# Altium PCB Nucleo_Dory_QFN68.PcbDoc (part 3 of 3)
Units mm, origin at the board's own origin, x right, y up, seen from the top; angles counter-clockwise.
Board outline 70.13 x 64.58 mm, 4 copper layers (L1, L2, L3, L4), stack 1.565 mm thick; 212 components, 161 nets, 1280 pads, 261 vias.
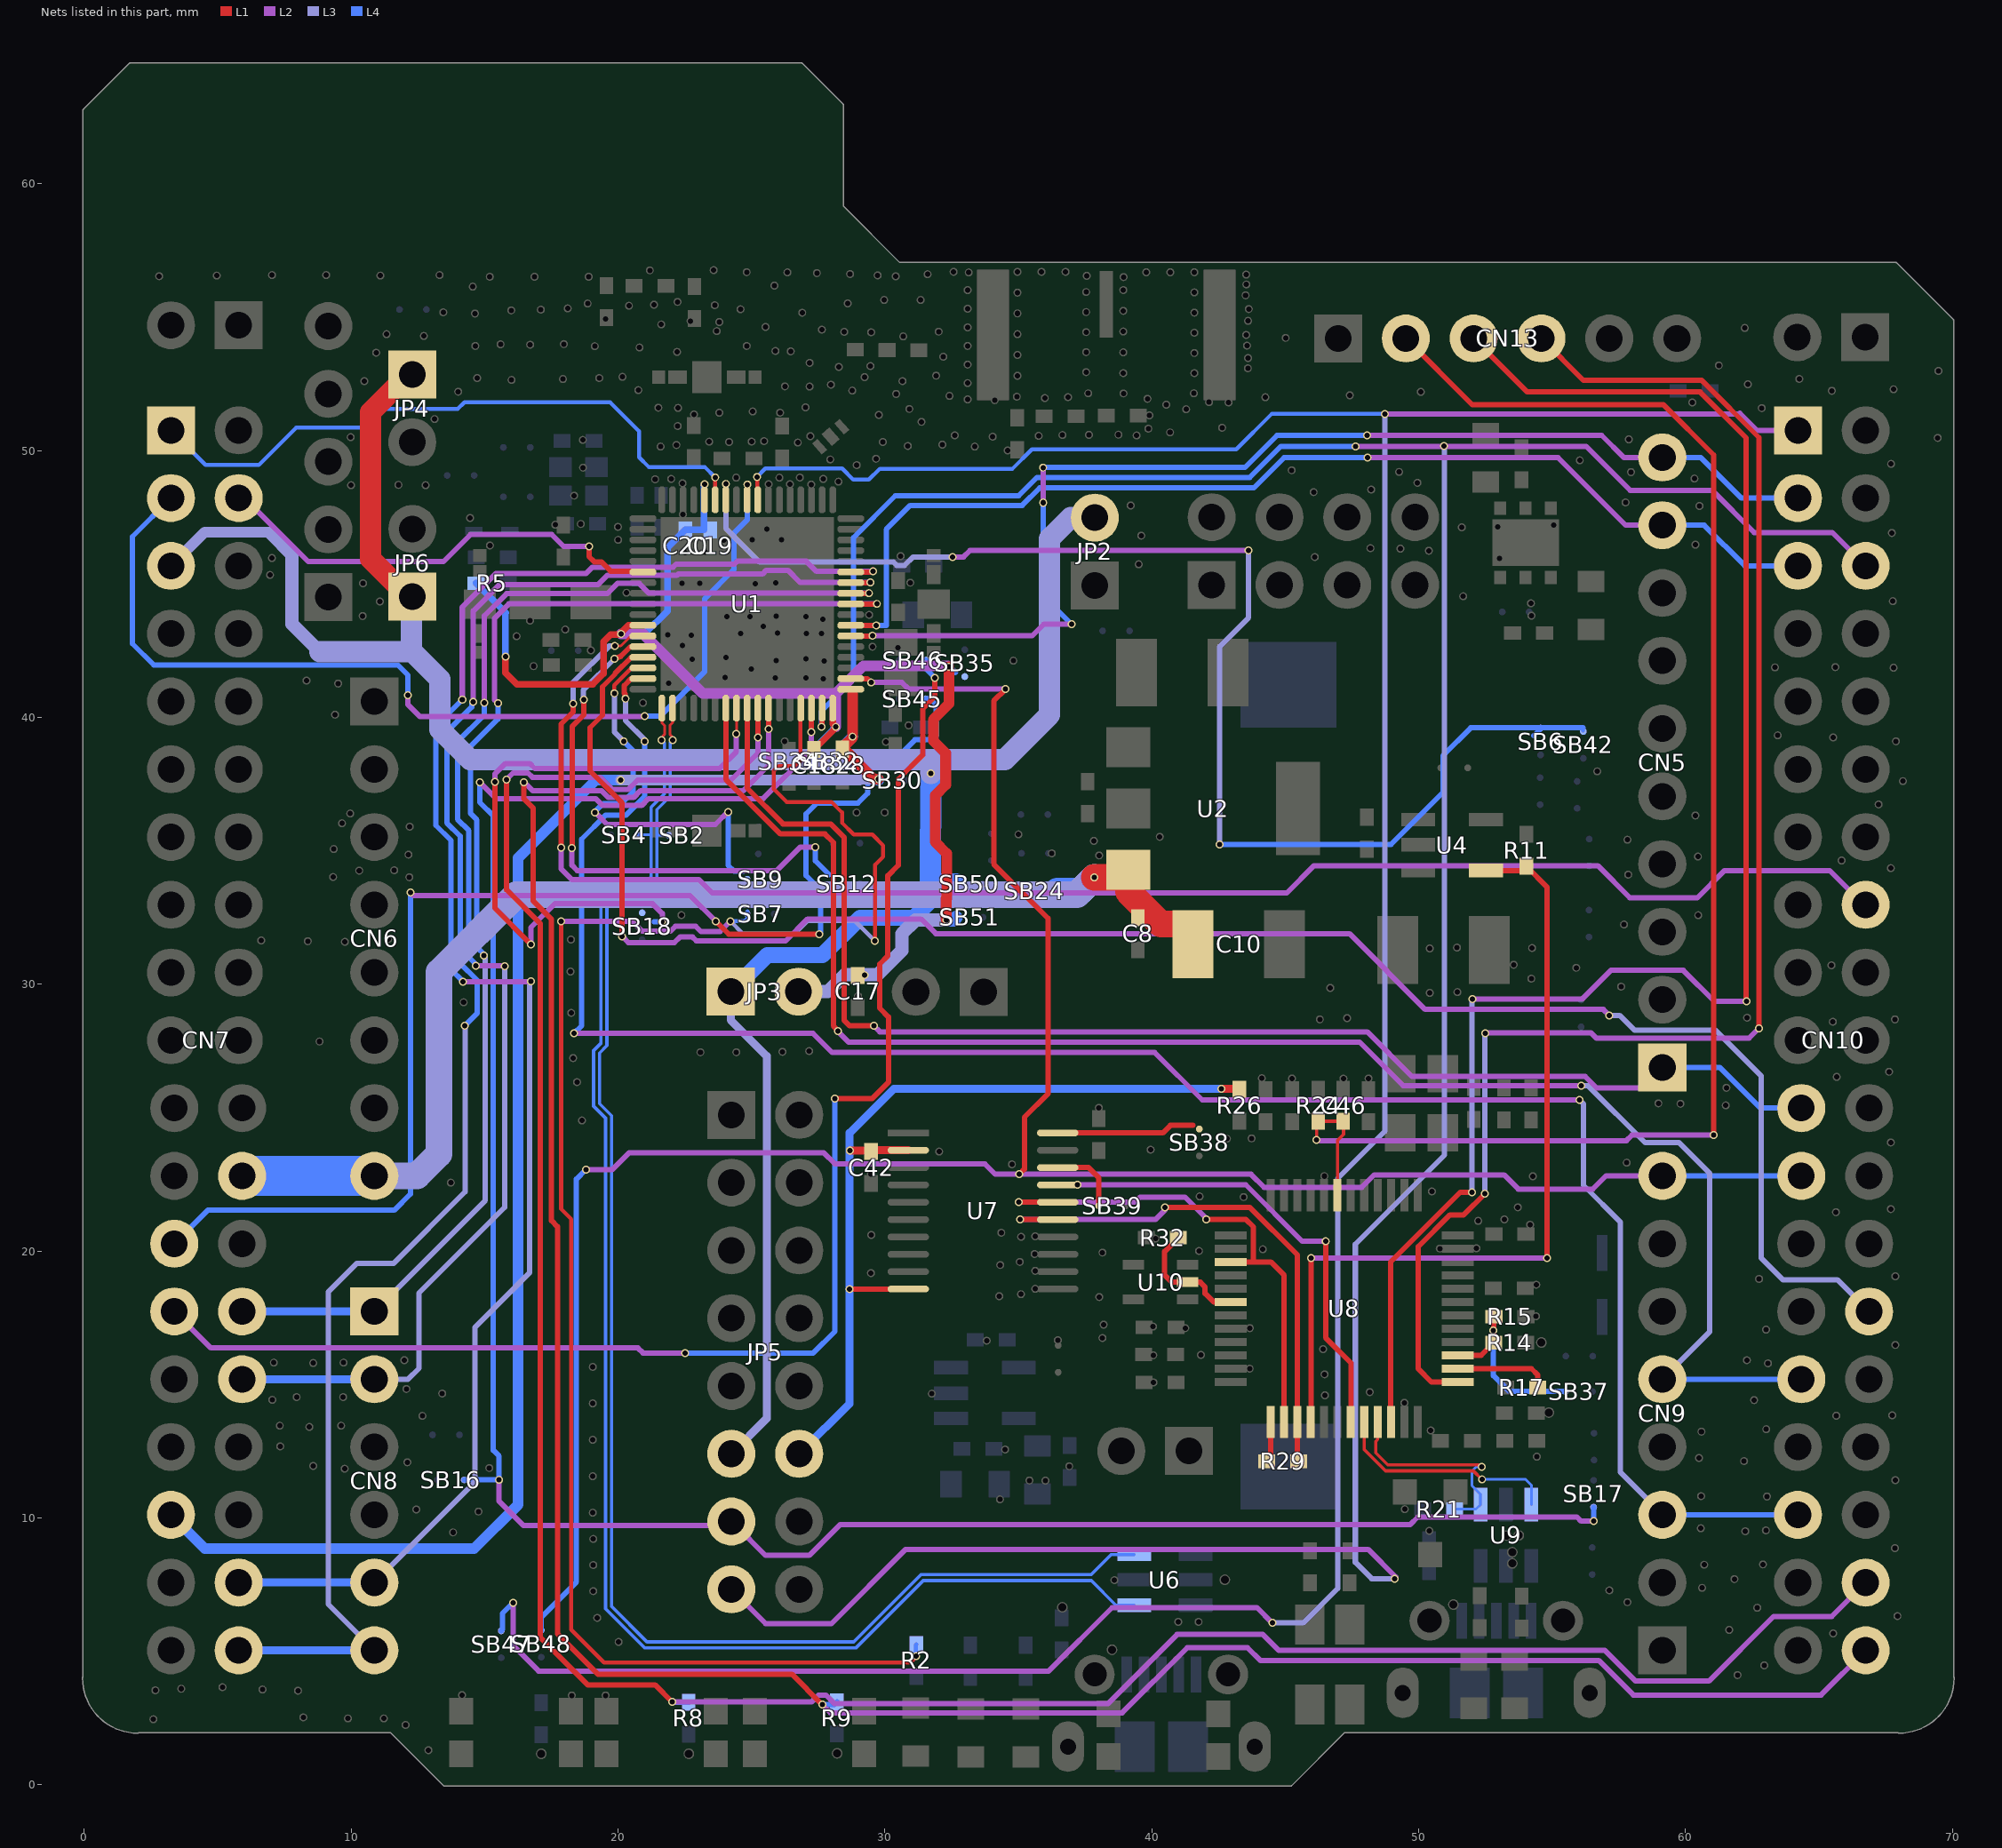
[diagram p5: the nets of this part, all layers, seen from the top]

## Via types
v1: diameter 0.3, hole 0.2, L1 to L4, tented both sides, 254 vias
v2: diameter 0.406, hole 0.203, L1 to L4, tented both sides, 7 vias

## Nets (pads, with @x,y where several pads share a name; then routed paths per layer and width w, separated by ;. In a path a pad name is that pad's centre, name@x,y a point inside that pad or via, vN(x,y) a via of type N, cw(c..) or ccw(c..) an arc to the next point about the centre after c; other vN are vias at no path point) (continued)
PB5: R2.1 SB7.1 U1.65 | length 67.3
  L1 w0.15: v1(17.87,32.352) 17.87,21.583 18.248,21.205 18.248,5.814 19.478,4.584 30.962,4.584 31.168,4.79 v1(31.168,4.829) ; U1.65@26.844,40.349 26.838,40.343 26.838,38.372 26.736,38.269 26.725,38.269 26.625,38.17 26.016,38.17 25.836,37.99 25.836,37.318 26.318,36.836 27.996,36.836 28.392,36.44 28.392,36.053 28.836,35.609 29.529,35.609 29.938,35.2 29.938,34.783 29.63,34.475 v1(29.63,31.634)
  L2 w0.2: v1(17.87,32.352) 20.536,32.352 20.903,31.985 21.963,31.985 22.155,32.177 22.906,32.177 23.108,31.975 23.825,31.975 v1(24.214,32.364)
  L3 w0.15: v1(24.214,32.364) 24.675,31.903 26.636,31.903 27.098,32.365 28.886,32.365 29.63,31.62 v1(29.63,31.634)
  L4 w0.15: v1(17.87,32.352) v1@17.872,32.354 ; v1@24.214,32.384 v1(24.214,32.364) 24.737,32.364 24.847,32.474 SB7.1@24.847,32.739 ; v1(31.168,4.829) 31.168,5.256 R2.1@31.175,5.263
PB6: JP5.13 pad.94 SB16.2 SB17.1 U1.66 | length 86.8
  L1 w0.2: v1(27.244,39.445) U1.66@27.244,40.349
  L2 w0.2: v1(14.816,37.576) 15.436,36.956 19.165,36.956 19.424,36.697 20.885,36.697 21.144,36.956 25.439,36.956 27.244,38.761 v1(27.244,39.445) v1@27.23,39.459 ; pad.94@15.546,11.427 15.546,10.632 16.452,9.726 24.399,9.726 25.529,8.596 27.166,8.596 28.327,9.757 49.69,9.757 49.967,10.034 55.933,10.034 56.089,9.878 v1(56.556,9.878)
  L4 w0.2: SB16.2@14.239,11.429 pad.94@15.544,11.429 15.544,12.321 15.327,12.538 15.327,36.309 14.816,36.82 v1(14.816,37.576) ; v1(56.556,9.878) SB17.1@56.556,10.405
PB7: CN10.6 JP5.15 U1.67 | length 121.5
  L1 w0.2: v1(27.621,39.652) 27.644,39.675 U1.67@27.644,40.349
  L2 w0.2: JP5.15@24.247,7.327 25.535,6.039 27.995,6.039 30.779,8.823 48.109,8.823 49.149,7.783 v1(49.095,7.729) ; v1(47.635,50.159) 56.275,50.159 57.923,48.511 60.99,48.511 62.569,46.932 65.498,46.932 CN10.6@66.75,45.68
  L3 w0.2: v1(49.095,7.729) 48.238,7.729 47.627,8.34 47.627,20.257 50.965,23.595 50.965,50.166 v1(50.955,50.176)
  L4 w0.2: v1(27.621,39.652) 27.621,40.234 28.826,41.439 28.826,46.743 30.389,48.306 35.009,48.306 35.692,48.989 43.667,48.989 44.837,50.159 v1(47.635,50.159)
PB8: CN5.10 CN10.3 pad.100 pad.127 U1.6 | length 44.5
  L1 w0.2: U1.6@28.722,43.052 29.523,43.052 pad.100@29.534,43.063
  L2 w0.2: pad.100@29.534,43.063 35.523,43.063 35.956,43.496 v1(36.992,43.496) ; pad.127@35.925,49.364 35.925,48.095 35.93,48.09 v1(35.93,48.049) ; v1(48.062,50.564) 56.851,50.564 56.857,50.57 57.683,49.744 CN5.10@59.13,49.744
  L4 w0.2: pad.127@35.925,49.368 43.491,49.368 44.693,50.57 44.699,50.564 v1(48.062,50.564) ; v1(35.93,48.049) 35.93,44.558 v1(36.992,43.496) ; CN5.10@59.13,49.744 60.565,49.744 62.089,48.22 CN10.3@64.21,48.22
PB9: CN5.9 CN10.5 pad.101 U1.7 | length 41.7
  L1 w0.2: U1.7@28.722,43.452 29.51,43.452
  L2 w0.2: v1(48.077,49.74) 55.222,49.74 57.758,47.204 CN5.9@59.13,47.204
  L4 w0.2: pad.101@29.678,43.448 30.048,43.448 30.048,47.047 30.949,47.948 35.146,47.948 35.803,48.605 43.825,48.605 44.96,49.74 v1(48.077,49.74) ; CN5.9@59.13,47.204 60.696,47.204 62.22,45.68 CN10.5@64.21,45.68
PB10: pad.72 SB6.2 SB42.1 U1.28 | length 50.3
  L2 w0.2: v1(32.543,46.016) 32.948,46.016 33.184,46.252 v1(43.628,46.252)
  L3 w0.2: pad.72@24.042,48.749 24.042,47.086 25.308,45.82 30.323,45.82 30.447,45.696 30.737,45.696 31.057,46.016 v1(32.543,46.016) ; v1(42.546,35.247) 42.546,42.659 43.628,43.741 v1(43.628,46.252)
  L4 w0.127: SB6.2@54.57,39.602 SB6.2@54.58,39.612 ; SB42.1@56.155,39.496 56.155,39.612
  L4 w0.2: v1(42.546,35.247) 48.968,35.247 50.907,37.186 50.907,38.567 51.95,39.61 54.606,39.61 54.314,39.318 ; SB6.2@54.58,39.612 56.155,39.612
PB11: CN7.1 pad.71 U1.29 | length 24.5
  L1 w0.15: U1.29@23.64,48.159 pad.71@23.64,48.996
  L4 w0.15: CN7.1@3.25,50.76 4.544,49.466 6.548,49.466 7.938,50.856 10.412,50.856 11.117,51.561 13.993,51.561 14.244,51.812 19.702,51.812 20.791,50.723 20.791,49.746 21.15,49.387 23.249,49.387 pad.71@23.64,48.996
PB12: CN10.16 pad.86 U1.46 | length 61.6
  L1 w0.1: pad.86@19.88,42.678 20.106,42.678 20.48,43.052 U1.46@20.941,43.052
  L1 w0.2: v1(17.87,35.119) 17.87,39.757 18.32,40.207 v1(18.32,40.516)
  L2 w0.2: v1@17.877,35.102 17.877,34.316 18.262,33.931 23.025,33.931 23.536,33.42 45.055,33.42 46.077,34.442 56.713,34.442 57.912,33.243 60.441,33.243 61.459,34.261 65.398,34.261 66.679,32.98 CN10.16@66.75,32.98
  L3 w0.2: v1(18.32,40.516) 18.32,41.323 19.675,42.678 pad.86@19.88,42.678
PB13: pad.87 SB12.1 U1.47 | length 21.2
  L1 w0.1: 20.076,42.29 20.032,42.315 20.468,42.682 U1.47@20.468,42.652
  L1 w0.2: v1(18.272,35.109) 18.282,35.119 18.282,39.66 18.721,40.099 v1(18.721,40.659) ; pad.87@19.866,42.196 20.097,42.281 20.468,42.652 U1.47@20.941,42.652
  L2 w0.2: v1(18.272,35.109) 18.272,34.461 18.469,34.264 25.952,34.264 26.821,35.133 v1(27.391,35.133)
  L3 w0.2: v1@18.71,40.542 v1@18.71,40.648 ; v1(18.721,40.659) v1@18.71,40.648 ; pad.87@19.866,42.196 18.71,41.04 v1@18.71,40.648
  L4 w0.2: v1(27.391,35.133) 27.391,34.629 27.912,34.108
PB14: CN10.28 U1.48 | length 69.4
  L1 w0.15: U1.48@20.483,42.252 U1.48@20.941,42.252
  L1 w0.17: 19.418,41.15 19.897,41.629 19.897,41.657
  L1 w0.2: 19.418,41.15 19.418,40.085 18.952,39.619 18.952,37.999 20.154,36.797 v1(20.154,31.796) ; 19.897,41.657 U1.48@20.483,42.242
  L2 w0.2: v1(20.154,31.796) 20.389,31.561 22.112,31.561 22.324,31.773 22.791,31.773 22.938,31.626 26.28,31.626 27.102,32.448 31.358,32.448 31.909,31.897 47.409,31.897 50.247,29.059 56.92,29.059 v1(57.148,28.831)
  L3 w0.2: v1(57.148,28.831) 57.155,28.838 57.53,28.838 58.084,28.284 61.113,28.284 62.827,26.57 62.827,19.746 63.644,18.929 65.688,18.929 CN10.28@66.877,17.74
PB15: pad.89 pad.135 SB9.1 U1.49 | length 15.5
  L1 w0.15: pad.89@19.863,40.906 19.863,41.208 20.507,41.852 U1.49@20.941,41.852
  L2 w0.2: v1@19.141,36.437 v1(19.138,36.44) 19.59,35.988 23.648,35.988 24.151,36.491 24.151,36.484 v1(24.126,36.459)
  L3 w0.2: pad.89@19.863,40.906 19.863,39.453 pad.135@20.21,39.106
  L4 w0.2: v1(19.138,36.44) 19.132,36.446 19.132,36.458 19.447,36.773 20.132,36.773 20.569,37.21 20.569,38.747 pad.135@20.21,39.106 ; v1(24.126,36.459) 24.126,34.456 24.349,34.233 24.72,34.233
PC0: CN7.28 CN8.1 pad.103 U1.9 | length 49
  L1 w0.2: U1.9@28.722,44.252 29.696,44.252 pad.103@29.698,44.254
  L2 w0.2: v1(15.499,40.529) 15.375,40.653 15.375,43.715 15.914,44.254 pad.103@29.698,44.254
  L3 w0.2: CN8.1@10.87,17.74 15.029,21.899 15.029,31.072 15.019,31.082 v1(14.976,31.082)
  L4 w0.2: v1(14.976,31.082) 15.023,31.082 14.714,31.391 14.714,36.161 14.466,36.409 14.466,38.905 15.499,39.938 v1(15.499,40.529)
  L4 w0.3: CN7.28@5.917,17.74 CN8.1@10.87,17.74
PC1: CN7.30 CN8.2 pad.104 U1.10 | length 53.8
  L1 w0.2: U1.10@28.722,44.652 29.398,44.652 pad.104@29.402,44.656
  L2 w0.2: v1(14.679,30.69) 15.738,30.69 v1(15.751,30.677) ; v1(14.991,40.543) 14.991,43.807 15.825,44.641 19.601,44.641 19.98,45.02 20.793,45.02 21.157,44.656 pad.104@29.402,44.656
  L3 w0.2: CN8.2@10.87,15.2 12.134,15.2 12.542,15.608 12.542,18.429 15.751,21.638 v1(15.751,30.677)
  L4 w0.2: v1(14.679,30.69) 14.679,30.744 14.414,31.009 14.414,35.758 13.988,36.184 13.988,39.087 14.991,40.09 v1(14.991,40.543)
  L4 w0.3: CN7.30@5.917,15.2 CN8.2@10.87,15.2
PC2: CN7.38 CN8.6 U1.11 | length 65.3
  L1 w0.2: U1.11@28.722,45.052 29.459,45.052 v1(29.463,45.056)
  L2 w0.2: v1(14.579,40.584) 14.579,43.992 15.571,44.983 19.257,44.983 19.594,45.32 22.206,45.32 22.261,45.375 25.415,45.375 25.555,45.516 26.368,45.516 26.828,45.056 v1(29.463,45.056) v1@29.491,45.028
  L3 w0.2: CN8.6@10.87,5.04 9.139,6.771 9.139,18.467 10.209,19.537 11.589,19.537 14.275,22.223 v1@14.275,28.454
  L4 w0.2: v1(14.263,28.454) 14.73,28.921 14.73,30.144 14.084,30.79 14.084,35.557 13.589,36.052 13.589,39.458 14.516,40.385 14.516,40.549 14.579,40.612 v1(14.579,40.584)
  L4 w0.3: CN7.38@5.79,5.04 CN8.6@10.87,5.04
PC3: CN7.36 CN8.5 U1.12 | length 64.6
  L1 w0.2: U1.12@28.722,45.452 29.481,45.452 29.551,45.522 v1(29.551,45.47)
  L2 w0.2: v1(14.166,40.667) 14.166,44.134 15.421,45.389 18.799,45.389 19.042,45.632 22.065,45.632 22.177,45.744 24.362,45.744 24.471,45.854 27.052,45.854 27.436,45.47 v1(29.551,45.47) ; v1(14.194,30.103) 16.722,30.103 v1(16.733,30.114)
  L3 w0.2: CN8.5@10.87,7.58 14.637,11.347 14.637,17.14 16.681,19.184 16.681,30.062 v1(16.733,30.114)
  L4 w0.2: v1(14.166,40.667) 13.177,39.678 13.177,35.955 13.741,35.391 13.741,30.556 v1(14.194,30.103)
  L4 w0.3: CN7.36@5.79,7.58 CN8.5@10.87,7.58
PC4: CN10.1 pad.75 SB47.2 U1.25 | length 122.1
  L1 w0.15: U1.25@25.21,48.189 25.21,48.557 25.226,48.557 25.226,48.996 pad.75@25.21,49.012
  L2 w0.2: v1(16.075,6.829) 16.075,5.213 17.025,4.263 36.136,4.263 38.511,6.638 43.944,6.638 v1(44.516,6.066) ; v1(48.729,51.363) 61.982,51.363 61.989,51.37 61.995,51.364 62.029,51.398 62.667,50.76 CN10.1@64.21,50.76
  L3 w0.2: v1(44.516,6.066) 45.679,6.066 46.971,7.358 46.971,22.728 48.727,24.484 48.727,51.361 v1(48.729,51.363)
  L4 w0.15: pad.75@25.21,49.012 25.524,49.326 28.395,49.326 28.81,48.911 29.403,48.911 29.813,49.321 34.781,49.321 35.509,50.049 43.168,50.049 44.49,51.371 48.721,51.371 v1(48.729,51.363)
  L4 w0.2: SB47.2@15.625,5.77 15.672,5.817 15.672,6.426 v1(16.075,6.829)
PC5: CN7.3 pad.74 U1.26 | length 37.6
  L2 w0.2: v1(12.131,40.827) 12.131,40.478 12.571,40.038 21.006,40.038 v1(21.006,40.046)
  L4 w0.2: CN7.3@3.25,48.22 1.807,46.777 1.807,42.763 2.607,41.963 11.751,41.963 12.131,41.583 v1(12.131,40.827) ; v1(21.006,40.046) 21.574,40.046 23.24,41.712 23.24,44.443 24.342,45.545 24.342,46.906 24.851,47.415 pad.74@24.851,48.728
PC6: CN9.3 CN10.33 pad.90 U1.50 | length 76.3
  L1 w0.2: pad.90@20.277,40.704 20.265,40.736 20.265,40.882 20.241,40.907 20.241,41.197 20.496,41.452 U1.50@20.941,41.452
  L2 w0.2: v1(18.349,28.159) 27.31,28.159 28.024,27.445 40.112,27.445 41.891,25.666 v1(56.027,25.666)
  L3 w0.2: pad.90@20.277,40.704 20.277,39.883 21.002,39.158 v1(21.002,39.106) ; v1(56.027,25.666) 56.174,25.519 56.174,22.47 57.563,21.081 57.563,11.711 59.13,10.144 CN9.3@59.13,10.12
  L4 w0.2: v1(18.349,28.159) 18.635,28.445 18.635,35.44 19.527,36.332 20.293,36.332 21.002,37.041 v1(21.002,39.106) ; CN9.3@59.13,10.12 CN10.33@64.21,10.12
PC10: CN9.5 CN10.29 U1.58 | length 63.4
  L1 w0.2: U1.58@24.044,40.349 24.044,37.683 26.091,35.636 27.752,35.636 28.067,35.321 28.067,28.44 v1@28.252,28.255
  L2 w0.2: v1(28.248,28.255) 28.248,28.222 28.637,27.833 47.785,27.833 49.42,26.198 v1(56.096,26.196)
  L3 w0.2: v1(56.096,26.196) 56.355,26.196 58.488,24.063 59.762,24.063 60.9,22.925 60.9,16.97 CN9.5@59.13,15.2
  L4 w0.2: CN9.5@59.13,15.2 CN10.29@64.337,15.2
PC11: SB18.2 U1.59 | length 24.9
  L1 w0.1: v1(24.435,39.387) 24.444,39.396 U1.59@24.444,40.349
  L1 w0.2: v1(15.389,37.592) 15.389,32.852 16.733,31.508 v1(16.733,31.489)
  L2 w0.2: v1(15.389,37.592) 15.385,37.596 15.385,37.88 15.779,38.274 16.698,38.274 16.886,38.086 23.805,38.086 24.435,38.716 v1(24.435,39.387) ; v1(16.733,31.489) 16.733,32.124 17.631,33.022 21.292,33.022 21.658,32.656 21.658,32.335 v1(21.653,32.335)
  L4 w0.2: 21.351,32.348 21.364,32.335 v1(21.653,32.335)
PC12: CN5.1 CN10.21 U1.60 | length 52.1
  L1 w0.2: U1.60@24.844,40.349 24.844,37.346 26.183,36.007 27.973,36.007 28.472,35.508 28.472,28.652 28.68,28.444 v1(29.591,28.444)
  L2 w0.2: v1(29.591,28.444) 29.813,28.222 48.075,28.222 49.751,26.546 56.241,26.546 56.674,26.113 58.359,26.113 CN5.1@59.13,26.884
  L4 w0.2: CN5.1@59.13,26.884 61.28,26.884 62.804,25.36 CN10.21@64.337,25.36
PC13: CN9.8 CN10.23 pad.97 SB48.2 U1.2 | length 90.5
  L1 w0.2: U1.2@28.722,41.452 29.34,41.452 pad.97@29.483,41.309 ; v1(34.524,41.063) 34.08,40.619 34.08,34.504 36.109,32.475 36.109,25.894 35.231,25.016 35.231,23.076 v1(35.035,22.88)
  L2 w0.2: v1(18.802,23.058) 19.787,23.058 20.409,23.68 27.715,23.68 28.127,23.268 33.745,23.268 34.133,22.88 v1(35.035,22.88) 43.721,22.88 44.212,22.389 47.865,22.389 48.335,22.859 53.201,22.859 53.733,22.327 56.525,22.327 57.018,22.82 CN9.8@59.13,22.82 ; pad.97@29.483,41.309 30.639,41.309 30.891,41.057 30.897,41.063 v1(34.524,41.063)
  L4 w0.2: SB48.2@17.124,5.793 17.124,6.28 18.442,7.598 18.442,22.698 v1(18.802,23.058) ; CN9.8@59.13,22.82 CN10.23@64.337,22.82
PC14: CN7.25 SB45.2 | length 50
  L1 w0.2: v1(23.664,32.363) 24.145,31.882 v1@27.571,31.882
  L2 w0.2: v1(12.219,33.444) 12.341,33.322 22.705,33.322 v1(23.664,32.363)
  L4 w0.2: CN7.25@3.377,20.28 4.631,21.534 11.614,21.534 12.219,22.139 v1(12.219,33.444) ; v1(27.54,31.882) 27.599,31.941 27.599,33.524 27.041,34.082 27.041,36.385 27.445,36.789 28.985,36.789 29.351,37.155 29.351,38.25 29.593,38.492 30.459,38.492 31.129,39.162 31.767,39.162 31.913,39.308 31.913,40.483 31.698,40.698 SB45.2@31.533,40.698
PC15: CN7.27 SB46.2 | length 53.7
  L1 w0.2: v1(28.123,25.72) 29.528,25.72 30.136,26.328 30.136,28.778 29.806,29.108 29.806,30.761 30.113,31.068 30.113,34.072 30.504,34.463 30.504,37.686 31.413,38.595 31.413,40.088 31.416,40.091 31.416,40.323 31.872,40.779 v1(31.872,41.484)
  L2 w0.2: CN7.27@3.377,17.74 4.744,16.373 20.744,16.373 20.936,16.181 v1(22.516,16.181)
  L4 w0.2: v1(22.516,16.181) 27.315,16.181 28.124,16.99 28.124,25.719 v1(28.123,25.72) ; SB46.2@31.543,42.147 31.543,41.813 v1(31.872,41.484)
PD0: CN10.36 R8.2 U1.61 | length 99.6
  L1 w0.2: v1(15.822,37.667) 15.822,33.544 17.084,32.282 17.084,5.529 18.864,3.749 21.386,3.749 v1(22.033,3.102) ; U1.61@25.244,40.349 25.244,39.257 v1(25.246,39.259)
  L2 w0.2: v1(15.822,37.667) 15.822,37.675 16.073,37.926 16.622,37.926 16.79,37.758 19.326,37.758 19.787,37.297 20.378,37.297 20.732,37.651 24.231,37.651 25.246,38.666 v1(25.246,39.259) ; v1(22.033,3.102) 27.251,3.102 27.507,3.358 27.797,3.358 28.105,3.05 38.365,3.05 40.95,5.635 44.161,5.635 44.75,5.046 56.97,5.046 58.126,3.89 60.876,3.89 63.293,6.307 65.477,6.307 CN10.36@66.75,7.58
  L4 w0.2: v1(22.033,3.102) 22.04,3.095 R8.2@22.646,3.095
PD1: CN10.38 R9.2 U1.62 | length 97.8
  L1 w0.2: v1(16.477,37.576) 16.477,36.947 16.825,36.599 16.825,33.118 17.508,32.435 17.508,21.143 17.733,20.918 17.733,5.664 19.249,4.148 26.512,4.148 v1(27.652,3.008) ; U1.62@25.644,40.349 25.644,39.572 v1(25.645,39.571)
  L2 w0.2: v1(16.477,37.576) 16.797,37.256 19.38,37.256 19.639,36.997 20.589,36.997 20.848,37.256 24.7,37.256 25.645,38.201 v1(25.645,39.571) ; v1(27.652,3.008) 27.964,2.696 38.888,2.696 41.327,5.135 43.59,5.135 44.065,4.66 56.749,4.66 58.043,3.366 65.076,3.366 CN10.38@66.75,5.04
  L4 w0.2: v1(27.652,3.008) 28.108,3.008 R9.2@28.203,3.103
PE4: CN7.4 U1.40 | length 17.4
  L1 w0.2: v1(18.911,46.408) 18.917,46.408 18.917,46.027 19.115,45.829 19.377,45.829 19.722,45.484 20.909,45.484 U1.40@20.941,45.452
  L2 w0.2: CN7.4@5.79,48.22 6.015,48.22 8.392,45.843 13.465,45.843 14.474,46.852 17.52,46.852 17.964,46.408 v1(18.911,46.408)
PWR_ENN: R11.2 U4.4 U8.28 | length 31.6
  L1 w0.2: U8.28@45.96,13.596 45.975,13.611 v1(45.975,19.733) ; U4.4@52.523,34.265 53.877,34.265 R11.2@54.034,34.422 54.818,33.638 54.818,19.749 v1(54.811,19.742)
  L2 w0.2: v1(45.975,19.733) 45.979,19.729 45.992,19.742 v1(54.811,19.742)
PWR_EXT: R14.2 R15.1 SB37.2 U8.39 | length 7.2
  L1 w0.2: U8.39@51.46,16.096 52.341,16.096 R14.2@52.811,16.566 52.811,17.536 R15.1@52.821,17.546
  L4 w0.2: v1(52.802,17.035) 52.802,15.337 53.4,14.739 SB37.2@55.503,14.739
STLK_RST: C46.2 CN13.2 R24.1 U8.7 | length 58.3
  L1 w0.127: v1(46.178,24.166) 46.178,24.805 R24.1@46.24,24.867 C46.2@47.17,24.867 47.19,24.847 47.19,24.377 46.96,24.147 U8.7@46.96,22.096
  L1 w0.2: CN13.2@49.52,54.204 52.012,51.712 59.179,51.712 61.054,49.837 61.054,24.355 v1(61.058,24.351)
  L2 w0.2: v1(46.178,24.166) 46.202,24.142 57.783,24.142 57.992,24.351 v1(61.058,24.351)
STLK_RX: SB39.1 U7.18 | length 2.8
  L1 w0.2: U7.18@36.475,23.131 37.637,23.131 38.01,22.758 SB39.1@38.01,21.696
STLK_SWCLK: CN13.4 U8.37 | length 57.9
  L1 w0.2: U8.37@51.46,15.096 50.48,15.096 49.987,15.589 49.987,20.173 51.175,21.361 51.688,21.361 v1(52.482,22.155) ; CN13.4@54.6,54.204 56.176,52.628 60.611,52.628 62.75,50.489 v1(62.75,28.354)
  L2 w0.2: v1(52.496,28.166) 52.513,28.183 56.456,28.183 56.652,27.987 62.383,27.987 v1(62.75,28.354)
  L3 w0.2: v1(52.482,22.155) 52.482,28.162 52.502,28.162 52.506,28.166 v1(52.496,28.166)
STLK_SWDIO: CN13.3 U8.34 | length 61.5
  L1 w0.2: U8.34@48.96,13.596 48.95,13.606 48.95,19.598 51.556,22.204 v1(52.001,22.204) ; CN13.3@52.06,54.204 54.068,52.196 60.551,52.196 62.275,50.472 v1@62.275,29.351
  L2 w0.2: v1(52.021,29.452) 56.13,29.452 57.202,30.524 59.917,30.524 61.079,29.362 v1(62.28,29.362)
  L3 w0.2: v1(52.001,22.204) 52.001,29.432 v1(52.021,29.452)
STLK_TX: SB38.1 U7.20 | length 5.2
  L1 w0.2: U7.20@36.475,24.431 40.417,24.431 40.7,24.714 41.547,24.714
T_NRST: R32.1 U8.18 U10.2 | length 4.7
  L1 w0.2: R32.1@40.999,20.506 40.48,19.987 40.48,19.106 40.75,18.836 U10.2@41.346,18.836 41.82,18.836 42,18.656 42,18.416 42.32,18.096 U8.18@42.96,18.096
T_SWCLK: U7.16 U8.15 U8.26 | length 19.8
  L1 w0.2: v1(35.017,21.834) 35.146,21.834 v1@35.146,21.841 ; v1@35.149,21.831 U7.16@36.475,21.831 ; v1(42.034,21.196) 43.521,21.196 43.811,20.906 43.811,19.596 ; U8.15@42.96,19.596 44.46,19.596 44.96,19.096 U8.26@44.96,13.596
  L2 w0.2: v1(35.017,21.834) 39.368,21.834 39.562,22.028 41.244,22.028 42.034,21.238 v1(42.034,21.196)
T_SWDIO: R29.1 U7.15 U8.27 | length 20.5
  L1 w0.2: v1(35.062,21.187) 35.068,21.181 U7.15@36.475,21.181 ; v1(40.501,21.645) 43.671,21.645 45.46,19.856 U8.27@45.46,13.596 R29.1@45.46,12.175
  L2 w0.2: v1@35.062,21.195 40.151,21.195 40.501,21.545 v1(40.501,21.645)
  L3 w0.2: v1(35.062,21.187) v1@35.062,21.195
T_SWDIO_IN: R29.2 U8.25 | length 1.5
  L1 w0.2: R29.2@44.311,12.126 44.46,12.275 U8.25@44.46,13.596
T_SWO: pad.55 U7.17 U8.31 | length 18.1
  L1 w0.2: U7.17@36.475,22.481 36.48,22.486 v1(37.214,22.486) ; pad.55@46.514,20.37 46.514,16.758 47.47,15.802 47.47,13.606 U8.31@47.46,13.596
  L2 w0.2: v1(37.214,22.486) 43.522,22.486 45.638,20.37 pad.55@46.514,20.37
T_VDD: C42.2 JP5.12 pad.27 R26.2 U7.2 U7.10 | length 32.5
  L1 w0.2: pad.27@28.68,18.581 U7.10@30.875,18.581
  L1 w0.3: v1(28.686,23.776) 29.432,23.776 C42.2@29.478,23.73 29.529,23.781 U7.2@30.875,23.781 ; v1(42.601,26.088) 43.257,26.088 R26.2@43.28,26.065
  L2 w0.3: v1(28.686,23.776) v1@28.709,23.753
  L4 w0.3: JP5.12@26.859,12.467 28.68,14.288 pad.27@28.68,18.577 28.68,24.427 30.341,26.088 v1(42.601,26.088)
USB_N: SB4.1 U1.52 U6.1 | length 57.8
  L1 w0.1: U1.52@21.644,40.349 21.644,39.799 21.744,39.699 21.744,39.361 21.676,39.293
  L4 w0.1: SB4.1@20.758,35.61 21.194,35.61
  L4 w0.12: v1(21.64,39.144) 21.737,39.047 21.737,37.134 21.237,36.634 21.237,34.035 20.552,33.349 19.682,33.349 19.366,33.034 19.366,27.795 19.087,27.516 19.087,25.435 19.536,24.986 19.536,6.597 20.994,5.138 28.923,5.138 31.438,7.653 37.739,7.653 38.658,6.734 U6.1@39.341,6.734
USB_P: SB2.1 U1.53 U6.3 | length 57.3
  L1 w0.1: v1@22.012,39.293 21.944,39.361 21.944,39.699 22.044,39.799 U1.53@22.044,40.349
  L4 w0.1: 21.478,35.588 SB2.1@21.89,35.588
  L4 w0.12: v1(22.054,39.159) 21.957,39.062 21.957,37.043 21.457,36.543 21.457,33.944 20.643,33.129 19.773,33.129 19.586,32.943 19.586,27.704 19.307,27.425 19.307,25.526 19.756,25.077 19.756,6.688 21.085,5.358 28.832,5.358 31.347,7.873 37.722,7.873 38.483,8.634 U6.3@39.341,8.634
USB_RENUMN: R17.2 U8.38 | length 3.6
  L1 w0.2: U8.38@51.46,15.596 54.228,15.596 54.455,15.369 R17.2@54.455,14.889
USBSTLK_N: pad.16 U8.32 U9.6 | length 8.6
  L1 w0.12: U8.32@47.96,13.596 47.96,12.564 48.756,11.768 52.049,11.768 pad.16@52.372,11.445
  L4 w0.1: pad.16@52.372,11.445 54.01,11.445 54.22,11.235 U9.6@54.22,10.504
USBSTLK_P: pad.17 R21.1 U8.33 U9.4 | length 8.2
  L1 w0.1: pad.17@52.357,11.91 pad.17@52.362,11.915
  L1 w0.12: U8.33@48.46,13.596 48.46,12.936 48.39,12.866 48.39,12.445 48.847,11.988 52.289,11.988 pad.17@52.362,11.915
  L4 w0.1: R21.1@51.439,10.334 52.15,10.334 U9.4@52.32,10.504 52.32,10.885 51.994,11.211 51.994,11.758 52.151,11.915 pad.17@52.362,11.915
VBAT: C28.1 CN7.33 pad.138 SB30.2 SB32.1 U1.1 | length 58.5
  L1 w0.4: 28.795,40.873 28.795,39.251 28.41,38.866 29.596,37.68 v1(29.751,37.68)
  L3 w0.4: CN7.33@2.949,10.12 CN7.33@3.25,10.12 ; v1(20.108,37.647) 29.053,37.647 ; 29.162,37.68 v1(29.751,37.68)
  L4 w0.4: CN7.33@3.25,10.12 4.524,8.846 14.6,8.846 16.253,10.499 16.253,34.734 19.166,37.647 v1(20.108,37.647) ; SB32.1@28.396,38.358 28.396,38.89 pad.138@28.786,39.28 ; v1(29.751,37.68) 29.751,37.641 29.76,37.632 SB30.2@29.776,37.648
VDD: CN7.5 JP2.2 JP3.1 JP4.1 JP5.11 JP6.1 SB50.1 | length 94.4
  L1 w0.8: JP6.1@12.163,44.509 10.73,45.942 10.73,51.435 JP4.1@12.192,52.897
  L3 w0.3: JP3.1@24.222,29.723 24.222,28.656 25.571,27.307 25.571,13.731 JP5.11@24.247,12.407
  L3 w0.4: CN7.5@3.25,45.68 4.52,46.95 6.942,46.95 7.012,46.88
  L3 w0.5: 7.012,46.88 7.784,46.108 7.784,43.503 8.823,42.464
  L3 w0.8: 8.823,42.464 12.242,42.464 ; JP6.1@11.983,44.422 12.255,44.15 12.255,42.492 13.321,41.426 13.321,39.546 14.453,38.414 31.622,38.414 ; v1(31.721,37.898) 31.721,38.315 31.622,38.414 ; JP2.2@38.046,47.307 37.863,47.49 36.964,47.49 36.171,46.697 36.171,40.093 34.492,38.414 31.622,38.414
  L4 w0.6: JP3.1@24.222,29.723 25.589,31.09 27.663,31.09 29.07,32.497 31.087,32.497 31.697,33.107 31.697,33.753 31.697,33.761
  L4 w0.8: 31.697,33.753 31.697,33.761 ; v1(31.721,37.898) 31.697,33.761 ; SB50.1@32.66,33.761 31.697,33.761
VDD_MCU: C17.1 C18.1 C19.1 C20.1 JP3.2 pad.70 pad.116 pad.124 pad.130 pad.131 R5.1 SB32.2 SB34.2 SB35.2 SB51.1 U1.30 U1.45 U1.68 | length 55.2
  L1 w0.25: v1(15.784,42.277) 15.784,41.668 16.208,41.244 19.053,41.244 19.457,41.648 19.457,42.841 19.723,43.107 20.049,43.107 20.394,43.452 U1.45@20.941,43.452 ; C18.1@27.344,38.802 pad.116@28.176,39.634 ; U1.68@28.044,40.349 28.044,39.766 pad.116@28.166,39.644
  L1 w0.4: pad.131@32.326,32.41 32.295,32.441 32.295,33.215 32.313,33.233 32.313,34.903 31.885,35.331 31.885,37.081 32.278,37.474 32.278,38.659 31.813,39.124 31.813,39.922 32.411,40.52 v1(32.411,41.893)
  L2 w0.4: pad.124@20.112,43.131 20.942,43.131 23.174,40.899 28.166,40.899 ; pad.116@28.166,39.644 28.166,40.899 ; v1(32.411,41.893) 32.37,41.934 29.201,41.934 28.166,40.899
  L3 w0.5: JP3.2@26.762,29.723 27.862,29.723 28.497,30.358 29.732,30.358 30.633,31.259 30.633,31.889 31.154,32.41 pad.131@32.301,32.41 pad.131@32.311,32.41
  L4 w0.25: R5.1@14.683,45.028 15.795,43.916 15.784,43.905 v1(15.784,42.277) ; pad.124@20.112,43.131 20.991,43.131 21.853,43.993 21.853,46.36 C20.1@22.521,47.028 23.224,47.028 23.224,48.719 pad.70@23.244,48.739 ; SB34.2@26.892,38.352 27.382,38.352 SB32.2@27.388,38.358 ; 27.45,38.668 27.45,38.928 pad.116@28.166,39.644 ; v1(32.411,41.893) 32.595,41.709 32.626,41.709
  L4 w0.5: pad.131@32.301,32.41 32.571,32.41 SB51.1@32.67,32.509
VIN: C8.1 C10.1 CN6.8 CN7.24 pad.109 SB24.2 U2.3 | length 46.5
  L1 w1: pad.109@37.844,34.004 38.845,34.004 U2.3@39.125,34.284 39.125,33.469 40.34,32.254 C10.1@40.796,32.254
  L3 w1: CN6.8@10.87,22.82 12.468,22.82 13.292,23.644 13.292,30.46 16.186,33.354 37.194,33.354 pad.109@37.844,34.004
  L4 w1: 36.459,33.495 37.335,33.495 pad.109@37.844,34.004
  L4 w1.5: CN7.24@5.917,22.82 CN6.8@10.87,22.82
pads on no net: CN6.1 CN7.9 CN7.11 CN7.17 CN7.21 CN7.22 CN7.23 CN7.26 CN7.35 CN7.37 CN10.2 CN10.10 CN10.18 CN13.5 U3.3 U3.5 U7.7 U7.8 U7.9 U8.4 U8.11 U8.14 U8.16 U8.17 U8.19 U8.22 U8.29 U8.40 U8.41 U8.42 U8.43 U8.45 U8.46 U10.1 X3.2 X3.4

## Polygon pours and split planes (outlines as drawn)
GND on L1 "GND_L01_P018" (solid, remove dead copper, pour order 18): 0.837,56.964 75.407,56.964 75.407,-6.596 -1.993,-6.596 -1.993,-6.276 -1.993,56.94 1.387,56.94
ANT on L1 "L2-No Net" (solid, pour order 14): 19.778,57.015 19.778,58.64 17.303,58.64 17.303,59.365 26.228,59.365 26.228,61.015 17.303,61.015 17.303,61.74 26.253,61.74 26.253,63.415 19.278,63.415 19.278,62.965 23.678,62.965 25.778,62.965 25.778,62.215 16.853,62.215 16.853,62.165 16.853,60.54 16.878,60.54 25.753,60.54 25.753,60.165 25.753,59.79 25.678,59.79 16.853,59.79 16.853,59.765 16.853,58.14 16.878,58.14 19.378,58.14 19.378,56.99 19.778,56.99
GND on L3 "GND_L03_P024" (solid, remove dead copper, pour order 24): -3.36,56.887 71.21,56.887 71.21,-6.673 -6.19,-6.673 -6.19,-6.353 -6.19,56.863 -2.81,56.863
GND on L4 "GND_L04_P026" (solid, remove dead copper, pour order 26): -3.139,56.84 71.431,56.84 71.431,-6.72 -5.969,-6.72 -5.969,-6.4 -5.969,56.816 -2.589,56.816
GND on L2 "GND_L02_P030" (solid, remove dead copper, pour order 30): -3.382,56.949 17.183,56.907 17.183,53.644 21.161,53.644 22.55,48.276 23.269,48.276 23.743,48.75 29.442,48.75 30.559,50.012 39.424,50.012 40.416,51.004 40.389,56.925 71.188,56.949 71.188,-6.611 -6.212,-6.611 -6.212,-6.291 -6.212,56.925 -2.832,56.925

## Keep-outs
Keep-Out Layer:
  lines w0.1: 0,4 0,57 ; 0,56.856 0,62.75 1.726,64.476 26.872,64.476 28.396,62.952 28.396,59.142 30.538,57 30.58,57 67.876,57 70,54.876 70,4 ; 2,2 11.5,2 13.514,-0.014 45.186,-0.014 47.2,2 48.5,2 68,2 ; 3.18,2.102 7.652,2.102 7.652,3.044 3.18,3.044 3.18,2.102
  lines w0.127: 0,4 ccw(c2,4) 2,2 ; 68,2 ccw(c68,4) 70,4

## Other copper
L1:
  text "L1" at 3.39,2.274 h0.51
L2:
  text "L2" at 4.484,2.274 h0.51
L3:
  text "L3" at 5.585,2.296 h0.51
L4:
  text "L4" at 6.653,2.296 h0.51

## Silkscreen, mask and mechanical layers (free items; w line width, h text height)
Top Overlay:
  rectangle: 56.232,52.004 58.289,52.708
  lines w0.1: 0.26,57.01 30.333,57.01
  lines w0.2: 19.857,45.441 20.342,45.441 ; 19.867,47.465 20.352,47.465 ; 19.917,41.445 20.402,41.445 ; 20.17,43.44 20.317,43.44 ; 22.817,5.955 19.006,5.955 19.006,26.577 22.817,26.577 ; 22.842,39.295 22.842,39.78 ; 23.242,48.758 23.242,49.002 ; 24.83,39.281 24.83,39.766 ; 25.232,48.792 25.232,49.012 ; 26.846,39.458 26.846,39.773 ; 27.241,48.792 27.241,49.277 ; 28.217,5.955 29.816,5.955 29.816,14.35 28.323,14.35 ; 28.23,11.015 28.23,10.998 29.745,10.998 ; 29.254,46.663 29.739,46.663 ; 29.259,44.65 29.708,44.65 ; 29.279,42.668 29.746,42.668 ; 29.766,31.111 29.766,35.052 35.1,35.052 35.1,31.111 ; 29.769,32.395 35.082,32.395 ; 37.461,11.112 37.461,8.662 42.795,8.662 42.795,11.112 ; 40.775,48.935 40.775,50.685 ; 51.262,48.935 51.262,50.728 ; 51.262,50.728 51.262,51.741 40.775,51.741 40.775,50.728 51.262,50.728 ; 14.829,35.752 31.829,35.752 31.829,52.752 14.829,52.752 14.829,35.752
  text "GND" at 5.21,56.314 h0.51
  text "GND" at 2.66,56.274 h0.51
  text "GND" at 63.63,55.984 h0.51
  text "GND" at 66.32,55.944 h0.51
  text "STLINK (Reserved)" at 47.662,55.576 h0.75
  text "VDD" at 14.403,52.987 h0.51 r90
  text "Vref" at 58.98,52.094 h0.51
  text "NRST" at 48.81,52.074 h0.51
  text "SWCLK" at 53.71,52.074 h0.51
  text "SWDIO" at 51.18,52.064 h0.51
  text "GND" at 46.36,52.014 h0.51
  text "2" at 68.575,50.693 h0.51
  text "1" at 1.245,50.595 h0.51
  text "1" at 62.265,50.597 h0.51
  text "5V sources" at 40.574,50.569 h0.6
  text "VDDRF" at 14.453,49.134 h0.51 r90
  text "5V / VIN" at 45.447,49.093 h0.51 r90
  text "USB / STL" at 50.545,49.115 h0.51 r90
  text "USB / MCU" at 47.965,49.085 h0.51 r90
  text "5V / EXT" at 42.988,49.059 h0.51 r90
  text "D15" at 57.412,48.959 h1 r90
  text "3" at 1.135,48.102 h0.51
  text "4" at 68.575,48.052 h0.51
  text "3" at 62.239,47.85 h0.51
  text "VDD" at 40.002,47.07 h0.51 r90
  text "D14" at 57.462,45.983 h1 r90
  text "VDDSMPS" at 14.396,45.488 h0.51 r90
  text "6" at 68.575,45.435 h0.51
  text "5" at 1.135,45.41 h0.51
  text "5" at 62.239,45.158 h0.51
  text "3V3" at 40.117,44.086 h0.51 r90
  text "AVDD" at 61.85,42.934 h1 r90
  text "8" at 68.575,42.921 h0.51
  text "7" at 1.135,42.768 h0.51
  text "7" at 62.239,42.516 h0.51
  text "8" at 7.474,42.223 h0.51
  text "VDD" at 14.376,42.21 h0.51 r90
  text "GND" at 54.936,41.569 h1
  text "10" at 68.575,40.406 h0.51
  text "9" at 1.159,40.381 h0.51
  text "10" at 7.503,40.33 h0.51
  text "9" at 62.263,40.129 h0.51
  text "D13" at 55.1,39.034 h1
  text "12" at 68.575,37.866 h0.51
  text "11" at 0.98,37.79 h0.51
  text "12" at 7.56,37.805 h0.51
  text "11" at 62.084,37.538 h0.51
  text "D12" at 55.219,36.95 h1
  text "IOREF" at 13.661,36.729 h1 r90
  text "RF Part" at 18.639,36.166 h1
  text "14" at 7.445,35.31 h0.51
  text "13" at 0.762,35.25 h0.51
  text "14" at 68.575,35.25 h0.51
  text "13" at 61.866,34.998 h0.51
  text "NRST" at 12.586,34.417 h1
  text "D11" at 55.421,33.386 h1
  text "16" at 7.445,32.814 h0.51
  text "15" at 0.762,32.786 h0.51
  text "16" at 68.575,32.71 h0.51
  text "15" at 61.866,32.534 h0.51
  text "Ext Battery" at 29.73,32.382 h0.75
  text "3V3" at 13.554,31.563 h1 r90
  text "+" at 33.398,31.366 h1
  text "D10" at 55.127,31.378 h1
  text "-" at 30.692,31.311 h1
  text "18" at 68.575,30.195 h0.51
  text "18" at 7.416,30.176 h0.51
  text "17" at 0.762,30.145 h0.51
  text "17" at 61.866,29.893 h0.51
  text "5V" at 13.59,29.425 h1 r90
  text "D9" at 55.85,28.862 h1
  text "20" at 68.575,27.909 h0.51
  text "20" at 7.474,27.766 h0.51
  text "19" at 0.786,27.706 h0.51
  text "VDD" at 22.507,27.555 h0.51
  text "VDD_MCU" at 25.035,27.518 h0.51
  text "19" at 61.89,27.454 h0.51
  text "GND" at 12.576,27.108 h1
  text "D8" at 55.876,26.346 h1
  text "22" at 7.52,25.275 h0.51
  text "22" at 68.575,25.268 h0.51
  text "21" at 0.9,25.166 h0.51
  text "21" at 61.74,25.12 h0.51
  text "GND" at 20.597,24.777 h0.75
  text "GND" at 12.524,24.708 h1
  text "24" at 68.575,22.601 h0.51
  text "24" at 7.531,22.574 h0.51
  text "23" at 0.682,22.525 h0.51
  text "23" at 61.522,22.479 h0.51
  text "D7" at 55.87,22.264 h1
  text "NRST" at 20.024,22.2 h0.75
  text "VIN" at 12.576,21.996 h1
  text "25" at 0.682,20.086 h0.51
  text "25" at 61.522,20.04 h0.51
  text "26" at 68.575,19.985 h0.51
  text "26" at 7.531,19.964 h0.51
  text "D6" at 55.9,19.784 h1
  text "SWDIO" at 19.642,19.719 h0.75
  text "27" at 0.682,17.648 h0.51
  text "27" at 61.522,17.602 h0.51
  text "28" at 68.575,17.597 h0.51
  text "28" at 7.56,17.497 h0.51
  text "A0" at 12.682,17.192 h1
  text "D5" at 55.85,17.164 h1
  text "SWCLK" at 19.261,17.081 h0.75
  text "30" at 7.503,15.117 h0.51
  text "30" at 68.575,15.032 h0.51
  text "29" at 0.706,14.93 h0.51
  text "29" at 61.546,14.884 h0.51
  text "A1" at 12.763,14.688 h1
  text "SWO" at 20.342,14.661 h0.75
  text "D4" at 55.894,14.666 h1
  text "MB1355C" at 18.243,12.507 h2.5 r90
  text "32" at 7.531,12.478 h0.51
  text "32" at 68.575,12.466 h0.51
  text "31" at 0.9,12.415 h0.51
  text "31" at 61.74,12.369 h0.51
  text "A2" at 12.743,12.293 h1
  text "D3" at 55.829,12.139 h1
  text "VDD / MCU" at 20.215,11.321 h0.75
  text "T_VDD" at 29.923,10.935 h0.6 r90
  text "TX" at 38.208,10.074 h0.75
  text "RX" at 40.891,10.039 h0.75
  text "34" at 7.531,9.982 h0.51
  text "34" at 68.575,9.926 h0.51
  text "33" at 0.682,9.901 h0.51
  text "33" at 61.522,9.855 h0.51
  text "A3" at 12.682,9.681 h1
  text "D2" at 55.76,9.574 h1
  text "TX" at 21.233,9.413 h0.75
  text "RX" at 29.423,9.22 h0.75 r90
  text "STLINK" at 37.537,8.803 h0.75
  text "36" at 68.575,7.412 h0.51
  text "36" at 7.56,7.372 h0.51
  text "35" at 0.682,7.285 h0.51
  text "35" at 61.522,7.239 h0.51
  text "D1" at 55.916,7.194 h1
  text "A4" at 12.682,7.177 h1
  text "RX" at 21.265,6.836 h0.75
  text "TX" at 29.423,6.688 h0.75 r90
  text "Reset" at 38.643,5.595 h1
  text "38" at 7.488,4.745 h0.51
  text "38" at 68.575,4.745 h0.51
  text "37" at 0.682,4.719 h0.51
  text "A5" at 12.682,4.673 h1
  text "37" at 61.522,4.673 h0.51
  text "D0" at 55.85,4.524 h1
  text "COM" at 44.922,4.058 h0.75 r90
Bottom Overlay:
  rectangle: 57.157,17.252 57.62,18.298
  rectangle: 56.12,17.242 56.588,18.298
  lines w0.1: 16.628,47.683 17.203,45.164 ; 29.8,31.116 29.8,28.612 35.074,28.612 35.074,31.142 29.804,31.142 ; 36.36,35.169 36.718,35.236 36.875,38.083 ; 7.089,42.816 7.424,42.816 10.913,42.816 10.913,55.856 7.424,55.856 7.089,55.856 7.089,42.816
  text "GND" at 3.805,55.824 h0.51
  text "GND" at 6.447,55.824 h0.51
  text "GND" at 64.816,55.468 h0.51
  text "GND" at 67.331,55.316 h0.51
  text "GND" at 10.186,54.222 h0.55 r270
  text "2" at 6.696,51.636 h0.51
  text "AT3" at 10.196,51.611 h0.55 r270
  text "2" at 68.607,50.719 h0.51
  text "1" at 1.595,50.515 h0.51
  text "1" at 62.648,50.388 h0.51
  text "4" at 6.696,49.031 h0.51
  text "AT2" at 10.196,48.968 h0.55 r270
  text "4" at 68.631,48.077 h0.51
  text "3" at 1.713,47.975 h0.51
  text "3" at 62.648,47.848 h0.51
  text "AT1" at 10.204,46.498 h0.55 r270
  text "6" at 6.752,46.425 h0.51
  text "6" at 68.583,45.461 h0.51
  text "5" at 1.713,45.435 h0.51
  text "5" at 62.648,45.308 h0.51
  text "8" at 6.752,44.044 h0.51
  text "AT0" at 10.229,43.782 h0.55 r270
  text "8" at 68.607,42.946 h0.51
  text "7" at 1.713,42.895 h0.51
  text "7" at 62.648,42.768 h0.51
  text "Analog Test Pin (Reserved)" at 5.761,41.803 h0.6 r270
  text "10" at 68.979,40.432 h0.51
  text "9" at 1.713,40.355 h0.51
  text "10" at 7.943,40.279 h0.51
  text "9" at 62.648,40.228 h0.51
  text "12" at 68.979,37.892 h0.51
  text "11" at 1.713,37.815 h0.51
  text "12" at 7.943,37.739 h0.51
  text "11" at 62.648,37.688 h0.51
  text "CR2032" at 48.659,36.164 h0.9 r270
  text "13" at 1.713,35.275 h0.51
  text "14" at 69.003,35.275 h0.51
  text "13" at 62.648,35.148 h0.51
  text "14" at 7.967,35.123 h0.51
  text "15" at 1.713,32.735 h0.51
  text "16" at 68.955,32.735 h0.51
  text "15" at 62.648,32.608 h0.51
  text "16" at 7.919,32.583 h0.51
  text "+" at 35.767,31.841 h1 r180
  text "-" at 30.19,31.808 h1 r180
  text "18" at 68.979,30.221 h0.51
  text "17" at 1.713,30.195 h0.51
  text "18" at 7.943,30.068 h0.51
  text "17" at 62.648,30.068 h0.51
  text "CN4" at 28.28,28.483 h1 r270
  text "20" at 69.059,27.935 h0.51
  text "20" at 8.023,27.782 h0.51
  text "19" at 1.713,27.655 h0.51
  text "19" at 62.648,27.528 h0.51
  text "Ext Battery" at 35.922,26.327 h0.75
  text "22" at 69.059,25.293 h0.51
  text "22" at 8.023,25.141 h0.51
  text "21" at 1.713,25.115 h0.51
  text "21" at 62.648,24.988 h0.51
  text "24" at 69.083,22.626 h0.51
  text "23" at 1.713,22.575 h0.51
  text "24" at 8.047,22.474 h0.51
  text "23" at 62.648,22.448 h0.51
  text "25" at 1.713,20.035 h0.51
  text "26" at 69.035,20.01 h0.51
  text "25" at 62.648,19.908 h0.51
  text "26" at 7.999,19.858 h0.51
  text "28" at 69.059,17.622 h0.51
  text "27" at 1.713,17.495 h0.51
  text "28" at 8.023,17.47 h0.51
  text "27" at 62.648,17.368 h0.51
  text "30" at 69.059,15.057 h0.51
  text "29" at 1.713,14.955 h0.51
  text "30" at 8.023,14.905 h0.51
  text "29" at 62.648,14.828 h0.51
  text "32" at 69.059,12.492 h0.51
  text "31" at 1.713,12.415 h0.51
  text "32" at 8.023,12.339 h0.51
  text "31" at 62.648,12.288 h0.51
  text "34" at 69.083,9.952 h0.51
  text "33" at 1.713,9.875 h0.51
  text "34" at 8.047,9.799 h0.51
  text "33" at 62.648,9.748 h0.51
  text "36" at 69.035,7.437 h0.51
  text "35" at 1.713,7.335 h0.51
  text "36" at 7.999,7.285 h0.51
  text "35" at 62.648,7.208 h0.51
  text "37" at 1.713,4.795 h0.51
  text "38" at 69.059,4.77 h0.51
  text "37" at 62.648,4.668 h0.51
  text "38" at 8.023,4.618 h0.51
  text "ST-LINK" at 47.609,2.936 h1 r270
  text "USB_USER" at 44.75,1.794 h1 r270
Mechanical 1:
  lines w0.1: 0,4 0,57 0,62.75 1.726,64.476 26.872,64.476 28.396,62.952 28.396,59.142 30.538,57 32.714,57 67.876,57 70,54.876 70,4 ; 2,2 11.37,2 11.5,2 13.501,-0.001 45.173,-0.001 47.164,1.989 ; 47.2,2 68,2
  lines w0.127: 0,4 ccw(c2,4) 2,2 ; 68,2 ccw(c68,4) 70,4
Mechanical:
  lines w0.1: -3.203,5.04 66.75,5.04 ; -1.991,0 13.5,0 ; 0,-3.336 0,4 ; 0,62.75 0,73.736 ; 3.25,-8.752 3.25,5.04 ; 5.79,-8.857 5.79,5.04 ; 26.872,64.476 79.068,64.476 ; 28.396,62.952 28.396,68.367 ; 45.2,0 79.374,0 ; 46.98,54.245 46.98,61.319 ; 46.98,63 46.98,54.204 87.224,54.204 ; 49.52,54.204 49.52,63 ; 59.68,54.204 59.68,63.443 ; 64.21,-8.708 64.21,5.04 ; 66.75,-13.228 66.75,5.04 ; 66.75,50.76 66.75,70.457 ; 66.812,50.76 87.177,50.76 ; 66.972,1.992 85.981,1.992 ; 67.876,57 83.142,57 ; 70,-13.324 70,4.566 ; 70,54.876 70,73.145 ; 85.836,5.04 66.75,5.04
  lines w0.254: 0,67.306 0,67.814 ; 0,70.68 0,71.188 ; 0.71,-7.539 3.25,-7.539 ; 1.524,67.052 0,67.56 ; 1.524,68.068 0,67.56 ; 1.524,70.426 0,70.934 ; 1.524,71.442 0,70.934 ; 1.726,-8.047 3.25,-7.539 ; 1.726,-7.031 3.25,-7.539 ; 3.25,-7.793 3.25,-7.285 ; 3.25,-4.742 3.25,-4.234 ; 4.774,-4.996 3.25,-4.488 ; 4.774,-3.98 3.25,-4.488 ; 5.79,-7.793 5.79,-7.285 ; 7.314,-8.047 5.79,-7.539 ; 7.314,-7.031 5.79,-7.539 ; 8.078,67.56 0,67.56 ; 8.33,-7.539 5.79,-7.539 ; 20.318,67.56 28.396,67.56 ; 26.872,67.052 28.396,67.56 ; 26.872,68.068 28.396,67.56 ; 28.396,67.306 28.396,67.814 ; 30.404,-4.485 3.25,-4.488 ; 31.801,70.934 0,70.934 ; 38.2,70.934 70,70.934 ; 39.596,-4.484 66.75,-4.481 ; 44.44,61.573 46.98,61.573 ; 45.456,61.065 46.98,61.573 ; 45.456,62.081 46.98,61.573 ; 46.98,61.319 46.98,61.827 ; 49.52,61.319 49.52,61.827 ; 51.044,61.065 49.52,61.573 ; 51.044,62.081 49.52,61.573 ; 52.06,61.573 49.52,61.573 ; 57.14,61.683 59.68,61.683 ; 58.156,61.175 59.68,61.683 ; 58.156,62.191 59.68,61.683 ; 59.68,61.429 59.68,61.937 ; 61.67,-6.001 64.21,-6.001 ; 62.686,-6.509 64.21,-6.001 ; 62.686,-5.493 64.21,-6.001 ; 64.19,68.649 66.73,68.65 ; 64.21,-6.255 64.21,-5.747 ; 64.224,-12.001 66.764,-12.001 ; 65.206,68.141 66.73,68.65 ; 65.206,69.157 66.73,68.65 ; 65.226,-4.989 66.75,-4.481 ; 65.226,-3.973 66.75,-4.481 ; 65.24,-12.509 66.764,-12.001 ; 65.24,-11.493 66.764,-12.001 ; 66.73,68.396 66.73,68.904 ; 66.75,-6.255 66.75,-5.747 ; 66.75,-4.735 66.75,-4.227 ; 66.75,61.429 66.75,61.937 ; 66.764,-12.255 66.764,-11.747 ; 68.274,-6.509 66.75,-6.001 ; 68.274,-5.493 66.75,-6.001 ; 68.274,61.175 66.75,61.683 ; 68.274,62.191 66.75,61.683 ; 68.476,70.426 70,70.934 ; 68.476,71.442 70,70.934 ; 69.29,-6.001 66.75,-6.001 ; 69.29,61.683 66.75,61.683 ; 70,-12.255 70,-11.747 ; 70,68.396 70,68.904 ; 70,70.68 70,71.188 ; 71.524,-12.509 70,-12.001 ; 71.524,-11.493 70,-12.001 ; 71.524,68.142 70,68.65 ; 71.524,69.158 70,68.65 ; 72.54,-12.001 70,-12.001 ; 72.54,68.65 70,68.65 ; 73.723,1.524 74.231,0 ; 73.723,55.476 74.231,57 ; 73.977,0 74.485,0 ; 73.977,57 74.485,57 ; 74.231,25.301 74.231,0 ; 74.231,31.699 74.231,57 ; 74.739,1.524 74.231,0 ; 74.739,55.476 74.231,57 ; 78.084,1.524 78.592,0 ; 78.084,62.952 78.592,64.476 ; 78.338,0 78.846,0 ; 78.338,64.476 78.846,64.476 ; 78.592,26.118 78.592,0 ; 78.592,38.358 78.592,64.476 ; 79.1,1.524 78.592,0 ; 79.1,62.952 78.592,64.476 ; 81.29,52.68 81.798,54.204 ; 81.29,58.524 81.798,57 ; 81.544,54.204 82.052,54.204 ; 81.544,57 82.052,57 ; 81.798,51.664 81.798,54.204 ; 81.798,59.54 81.798,57 ; 82.306,52.68 81.798,54.204 ; 82.306,58.524 81.798,57 ; 86.049,49.236 86.557,50.76 ; 86.049,55.728 86.557,54.204 ; 86.303,50.76 86.811,50.76 ; 86.303,54.204 86.811,54.204 ; 86.557,48.22 86.557,50.76 ; 86.557,56.744 86.557,54.204 ; 87.065,49.236 86.557,50.76 ; 87.065,55.728 86.557,54.204
  text "70mm" at 32.055,70.02 h1.52
  text "28.396mm" at 8.332,66.646 h1.52
  text "3.27mm" at 64.023,64.993 h1.52 r0.01
  text "7.07mm" at 58.873,58.027 h1.52
  text "2.54mm" at 43.908,57.917 h1.52
  text "2.796mm" at 85.455,50.498 h1.52 r90
  text "3.444mm" at 90.214,47.378 h1.52 r90
  text "64.476mm" at 79.506,26.372 h1.52 r90
  text "57mm" at 75.145,25.555 h1.52 r90
  text "63.5mm" at 30.658,-5.399 h1.52 r0.01
  text "2.54mm" at 61.138,-9.658 h1.52
  text "2.54mm" at 0.178,-11.196 h1.52
  text "3.237mm" at 63.278,-15.658 h1.52

## Text inside footprints (layer, text, board x,y; h text height)
CN1: Bottom Overlay "1" at 41.841,2.675 h0.51; Bottom Overlay "5" at 39.209,2.675 h0.51; Mechanical 27 "EDGE" at 35.797,-0.495 h0.51; Mechanical 27 "1" at 41.791,3.725 h0.51; Mechanical 27 "5" at 39.159,3.725 h0.51; Mechanical 27 "PCB" at 46.01,-0.495 h0.51
CN15: Bottom Overlay "1" at 54.388,4.69 h0.51; Bottom Overlay "5" at 51.757,4.69 h0.51; Mechanical 27 "EDGE" at 48.345,1.52 h0.51; Mechanical 27 "1" at 54.338,5.74 h0.51; Mechanical 27 "5" at 51.707,5.74 h0.51; Mechanical 27 "PCB" at 58.557,1.52 h0.51
Label_2: Bottom Overlay "2002/95/EC" at 29.364,18.165 h0.8 r270; Bottom Overlay "COMPLIANT" at 30.664,18.665 h0.8 r270; Bottom Overlay "RoHS" at 32.064,19.065 h1.6 r270
Label_4: Top Overlay "STM32" at 16.024,28.042 h1.5
U2: Mechanical 27 "4" at 44.7,36.809 h0.51 r270; Mechanical 27 "1" at 38.95,39.084 h0.51 r270; Mechanical 27 "2" at 38.925,36.934 h0.51 r270; Mechanical 27 "3" at 38.9,34.634 h0.51 r270